# EAGLE board IR_and_skip-orig (EAGLE 5.11)
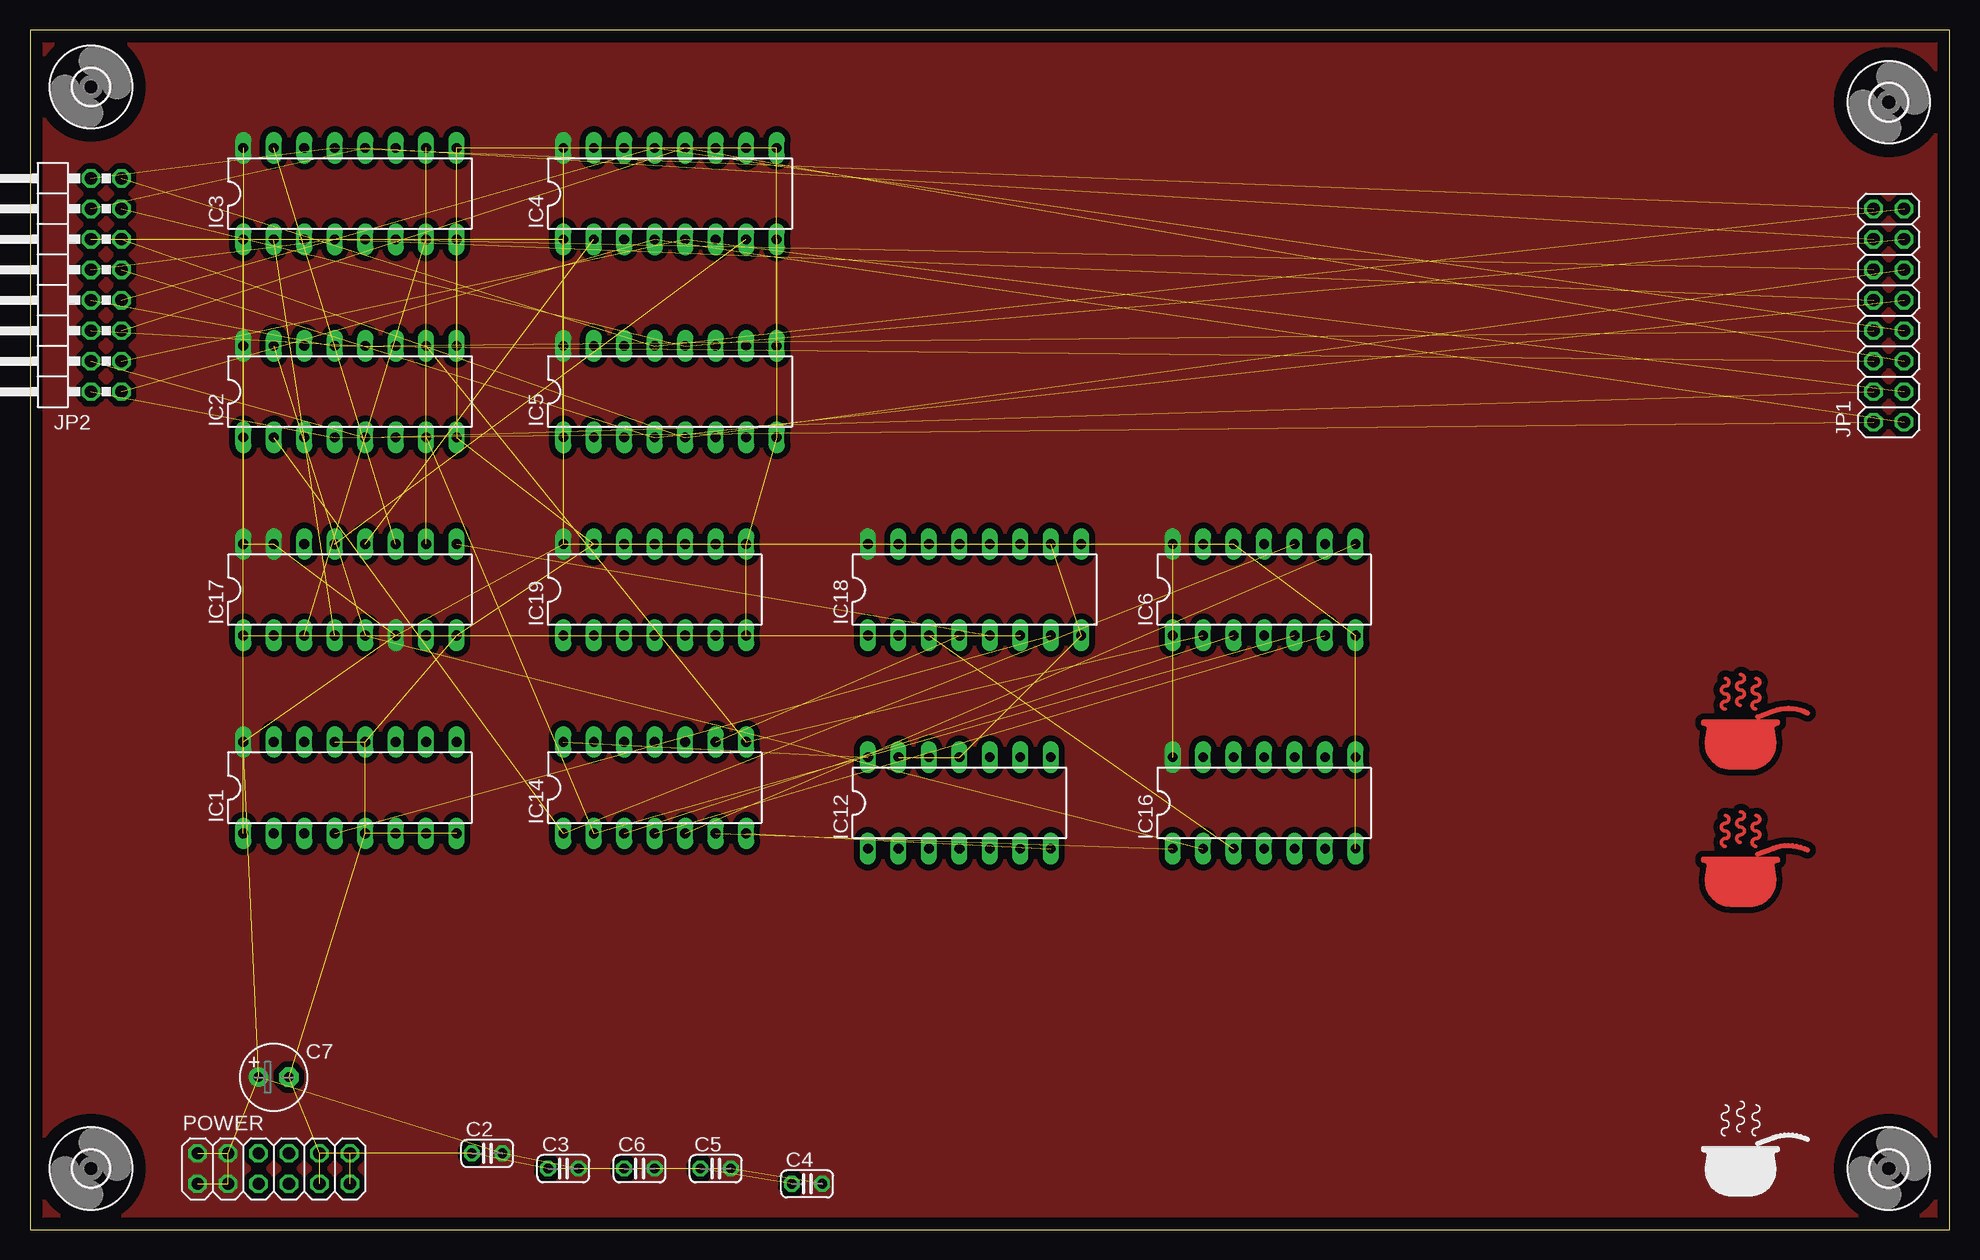
[diagram p0: board, top side]
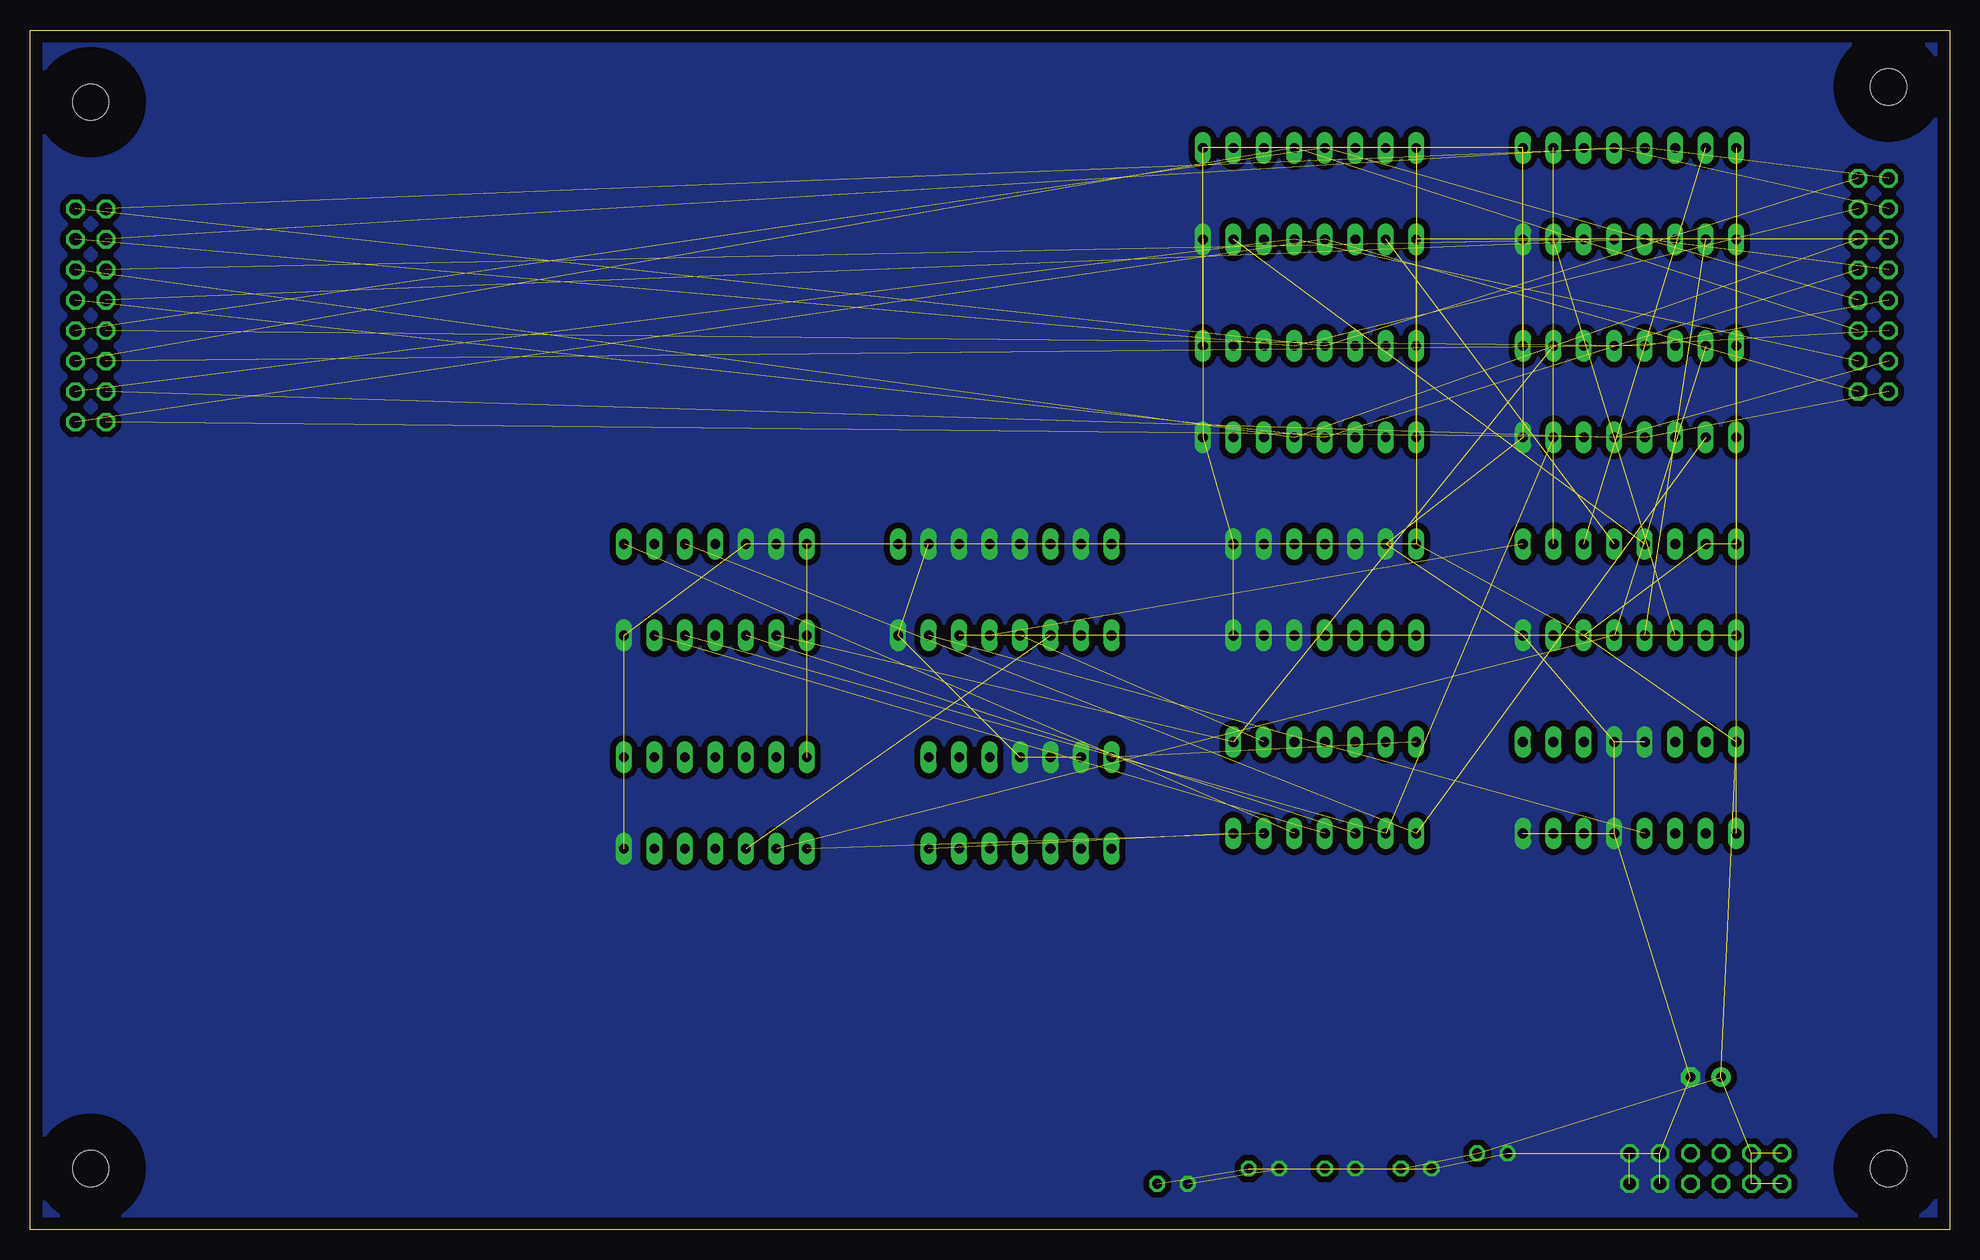
[diagram p1: board, bottom side, seen from below]

Size 160 x 100 mm. Coordinates in mm from the lower left corner, seen from the top.
Outline: 0,0 160,0 160,100 0,100 0,0
Copper layers (1*16): Top 0.035mm / dielectric 1.5mm / Bottom 0.035mm
Design rules "default": minimum track width 10mil, minimum drill 24mil, track to track 8mil, track to pad 8mil, pad to pad 8mil, via to via 8mil, smd to smd 8mil, copper to edge 40mil, drill to drill 8mil, minimum pad ring 10mil, minimum via ring 8mil, stop-mask expansion 4mil, vias tented up to drill 0mil, thermal gap 10mil

## Footprints (pad centres in the part's own frame; a part is rotated, then mirrored left to right if it is on the bottom)
C025-024X044 = drill 0.813 octagon: 1 -1.27,0; 2 1.27,0
E2,5-6 = drill 0.813 pad 1.6 round: + -1.27,0 | drill 0.813 pad 1.6 octagon: - 1.27,0
3,0 = hole 3: 0,0
DIL16 = drill 0.813 long: 1 -8.89,-3.81; 2 -6.35,-3.81; 3 -3.81,-3.81; 4 -1.27,-3.81; 5 1.27,-3.81; 6 3.81,-3.81; 7 6.35,-3.81; 8 8.89,-3.81; 9 8.89,3.81; 10 6.35,3.81; 11 3.81,3.81; 12 1.27,3.81; 13 -1.27,3.81; 14 -3.81,3.81; 15 -6.35,3.81; 16 -8.89,3.81
DIL14 = drill 0.813 long: 1 -7.62,-3.81; 2 -5.08,-3.81; 3 -2.54,-3.81; 4 0,-3.81; 5 2.54,-3.81; 6 5.08,-3.81; 7 7.62,-3.81; 8 7.62,3.81; 9 5.08,3.81; 10 2.54,3.81; 11 0,3.81; 12 -2.54,3.81; 13 -5.08,3.81; 14 -7.62,3.81
2X08 = drill 1.016 octagon: 1 -8.89,-1.27; 2 -8.89,1.27; 3 -6.35,-1.27; 4 -6.35,1.27; 5 -3.81,-1.27; 6 -3.81,1.27; 7 -1.27,-1.27; 8 -1.27,1.27; 9 1.27,-1.27; 10 1.27,1.27; 11 3.81,-1.27; 12 3.81,1.27; 13 6.35,-1.27; 14 6.35,1.27; 15 8.89,-1.27; 16 8.89,1.27
2X08/90 = drill 1.016 octagon: 1 -8.89,-6.35; 2 -8.89,-3.81; 3 -6.35,-6.35; 4 -6.35,-3.81; 5 -3.81,-6.35; 6 -3.81,-3.81; 7 -1.27,-6.35; 8 -1.27,-3.81; 9 1.27,-6.35; 10 1.27,-3.81; 11 3.81,-6.35; 12 3.81,-3.81; 13 6.35,-6.35; 14 6.35,-3.81; 15 8.89,-6.35; 16 8.89,-3.81
2X06 = drill 1.016 octagon: 1 -6.35,-1.27; 2 -6.35,1.27; 3 -3.81,-1.27; 4 -3.81,1.27; 5 -1.27,-1.27; 6 -1.27,1.27; 7 1.27,-1.27; 8 1.27,1.27; 9 3.81,-1.27; 10 3.81,1.27; 11 6.35,-1.27; 12 6.35,1.27

## Placement (x,y rotation side)
C2  [C025-024X044]  38.1,6.35 0 top
C3  [C025-024X044]  44.45,5.08 0 top
C4  [C025-024X044]  64.77,3.81 0 top
C5  [C025-024X044]  57.15,5.08 0 top
C6  [C025-024X044]  50.8,5.08 0 top
C7  [E2,5-6]  20.32,12.7 0 top
H1  MOUNT-HOLE3.0  [3,0]  5.08,5.08 0 top
H2  MOUNT-HOLE3.0  [3,0]  154.94,5.08 0 top
H3  MOUNT-HOLE3.0  [3,0]  154.94,93.98 0 top
H4  MOUNT-HOLE3.0  [3,0]  5.08,95.25 0 top
IC1  74HCT175N  [DIL16]  26.67,36.83 0 top
IC2  74HCT175N  [DIL16]  26.67,69.85 0 top
IC3  74HCT175N  [DIL16]  26.67,86.36 0 top
IC4  74HCT175N  [DIL16]  53.34,86.36 0 top
IC5  74HCT175N  [DIL16]  53.34,69.85 0 top
IC6  74HCT08N  [DIL14]  102.87,53.34 0 top
IC12  4075N  [DIL14]  77.47,35.56 0 top
IC14  74HCT4075E  [DIL14]  52.07,36.83 0 top
IC16  74HCT266N  [DIL14]  102.87,35.56 0 top
IC17  74HCT253N  [DIL16]  26.67,53.34 0 top
IC18  74HCT253N  [DIL16]  78.74,53.34 0 top
IC19  74HCT266N  [DIL14]  52.07,53.34 0 top
JP1  [2X08]  154.94,76.2 90 top
JP2  [2X08/90]  1.27,78.74 90 top
POWER  [2X06]  20.32,5.08 0 top
U$1  SIGNATUREPLANE  [SIGNATURE_PLANE]  139.7,26.67 0 top
U$2  SIGNATUREPLANE  [SIGNATURE_PLANE]  139.7,38.1 0 top
U$3  SIGNATURESILK  [SIGNATURE]  139.7,2.54 0 top

## Library data of the parts
C2-C7 = rcl
H1-H4 = holes
IC1-IC6 IC16-IC19 = 74xx-eu
IC12 IC14 = 40xx
JP1 JP2 POWER = pinhead
U$1-U$3 = alexios

## Nets
-RESET: IC1.1 IC2.1 IC3.1 IC4.1 IC5.1
CLOCK: IC1.9
F_L: IC6.9
F_NEG: IC6.1
F_ZERO: IC6.4
GND: C2.1 C3.1 C4.1 C5.1 C6.1 C7.- IC1.5 IC1.8 IC1.12 IC1.13 IC2.8 IC3.8 IC4.8 IC5.8 IC6.7 IC6.12 IC6.13 IC12.11 IC12.12 IC12.13 IC16.7 IC17.8 IC18.8 IC18.10 IC18.11 IC18.12 IC18.13 IC18.15 IC19.5 IC19.6 IC19.7 IC19.8 IC19.9 IC19.12 IC19.13 POWER.9 POWER.10 POWER.11 POWER.12
IBUS0: IC2.4 JP1.2 JP2.2
IBUS1: IC2.5 JP1.4 JP2.4
IBUS2: IC2.12 JP1.6 JP2.6
IBUS3: IC2.13 JP1.8 JP2.8
IBUS4: IC3.4 JP1.10 JP2.10
IBUS5: IC3.5 JP1.12 JP2.12
IBUS6: IC3.12 JP1.14 JP2.14
IBUS7: IC3.13 JP1.16 JP2.16
IBUS8: IC4.4 JP1.1 JP2.1
IBUS9: IC4.5 JP1.3 JP2.3
IBUS10: IC4.12 JP1.5 JP2.5
IBUS11: IC4.13 JP1.7 JP2.7
IBUS12: IC5.4 JP1.9 JP2.9
IBUS13: IC5.5 JP1.11 JP2.11
IBUS14: IC5.12 JP1.13 JP2.13
IBUS15: IC5.13 JP1.15 JP2.15
IR0: IC2.2 IC6.10 IC14.1
IR1: IC2.7 IC6.5 IC14.2
IR2: IC2.10 IC6.2 IC14.8
IR3: IC2.15 IC16.2 IC17.5
IR4: IC3.2 IC17.4
IR5: IC3.7 IC17.3
IR6: IC3.10 IC17.10
IR7: IC3.15 IC17.11
IR8: IC4.2 IC17.12
IR9: IC4.7 IC17.13
IR10: IC4.10
IR11: IC4.15
IR12: IC5.2
IR13: IC5.7
IR14: IC5.10
IR15: IC5.15
OP1_BRANCH: IC16.3 IC18.3
OP2_ROLL: IC14.9 IC18.4
OP_IF0: IC17.14
OP_IF1: IC17.2
OP_IF2: IC18.14
OP_IF3: IC18.2
RSTHOLD: IC17.1 IC18.1
SKIP: IC1.2
SKIP0: IC1.4 IC18.7
SL: IC6.8 IC14.5
SN: IC6.3 IC14.3
SX: IC14.6 IC16.1
SZ: IC6.6 IC14.4
VCC: C2.2 C3.2 C4.2 C5.2 C6.2 C7.+ IC1.16 IC2.16 IC3.16 IC4.16 IC5.16 IC6.14 IC16.14 IC17.6 IC17.15 IC17.16 IC18.16 IC19.14 POWER.1 POWER.2 POWER.3 POWER.4
VDD: IC12.14 IC14.14
VSS: IC12.7 IC14.7
W_IR: IC2.9 IC3.9 IC4.9 IC5.9
YA: IC17.7 IC18.6
YB: IC17.9 IC18.5

## Tracks (layer width: path | path; a pad name or v marks a point on that pad's centre or on a via)
-RESET  (4 unrouted)
GND  (38 unrouted)
  pour Bottom (isolate 0.508, no thermals): 0,100.33 0,0 160.02,0 160.02,99.06 160.02,100.33
IBUS0  (2 unrouted)
IBUS1  (2 unrouted)
IBUS2  (2 unrouted)
IBUS3  (2 unrouted)
IBUS4  (2 unrouted)
IBUS5  (2 unrouted)
IBUS6  (2 unrouted)
IBUS7  (2 unrouted)
IBUS8  (2 unrouted)
IBUS9  (2 unrouted)
IBUS10  (2 unrouted)
IBUS11  (2 unrouted)
IBUS12  (2 unrouted)
IBUS13  (2 unrouted)
IBUS14  (2 unrouted)
IBUS15  (2 unrouted)
IR0  (2 unrouted)
IR1  (2 unrouted)
IR2  (2 unrouted)
IR3  (2 unrouted)
IR4  (1 unrouted)
IR5  (1 unrouted)
IR6  (1 unrouted)
IR7  (1 unrouted)
IR8  (1 unrouted)
IR9  (1 unrouted)
OP1_BRANCH  (1 unrouted)
OP2_ROLL  (1 unrouted)
RSTHOLD  (1 unrouted)
SKIP0  (1 unrouted)
SL  (1 unrouted)
SN  (1 unrouted)
SX  (1 unrouted)
SZ  (1 unrouted)
VCC  (21 unrouted)
  pour Top (isolate 0.508, no thermals): 0,100.33 0,0 160.02,0 160.02,99.06 160.02,100.33
VDD  (1 unrouted)
VSS  (1 unrouted)
W_IR  (3 unrouted)
YA  (1 unrouted)
YB  (1 unrouted)